# EAGLE board IO4-Turtle_array (EAGLE 7.7.0)
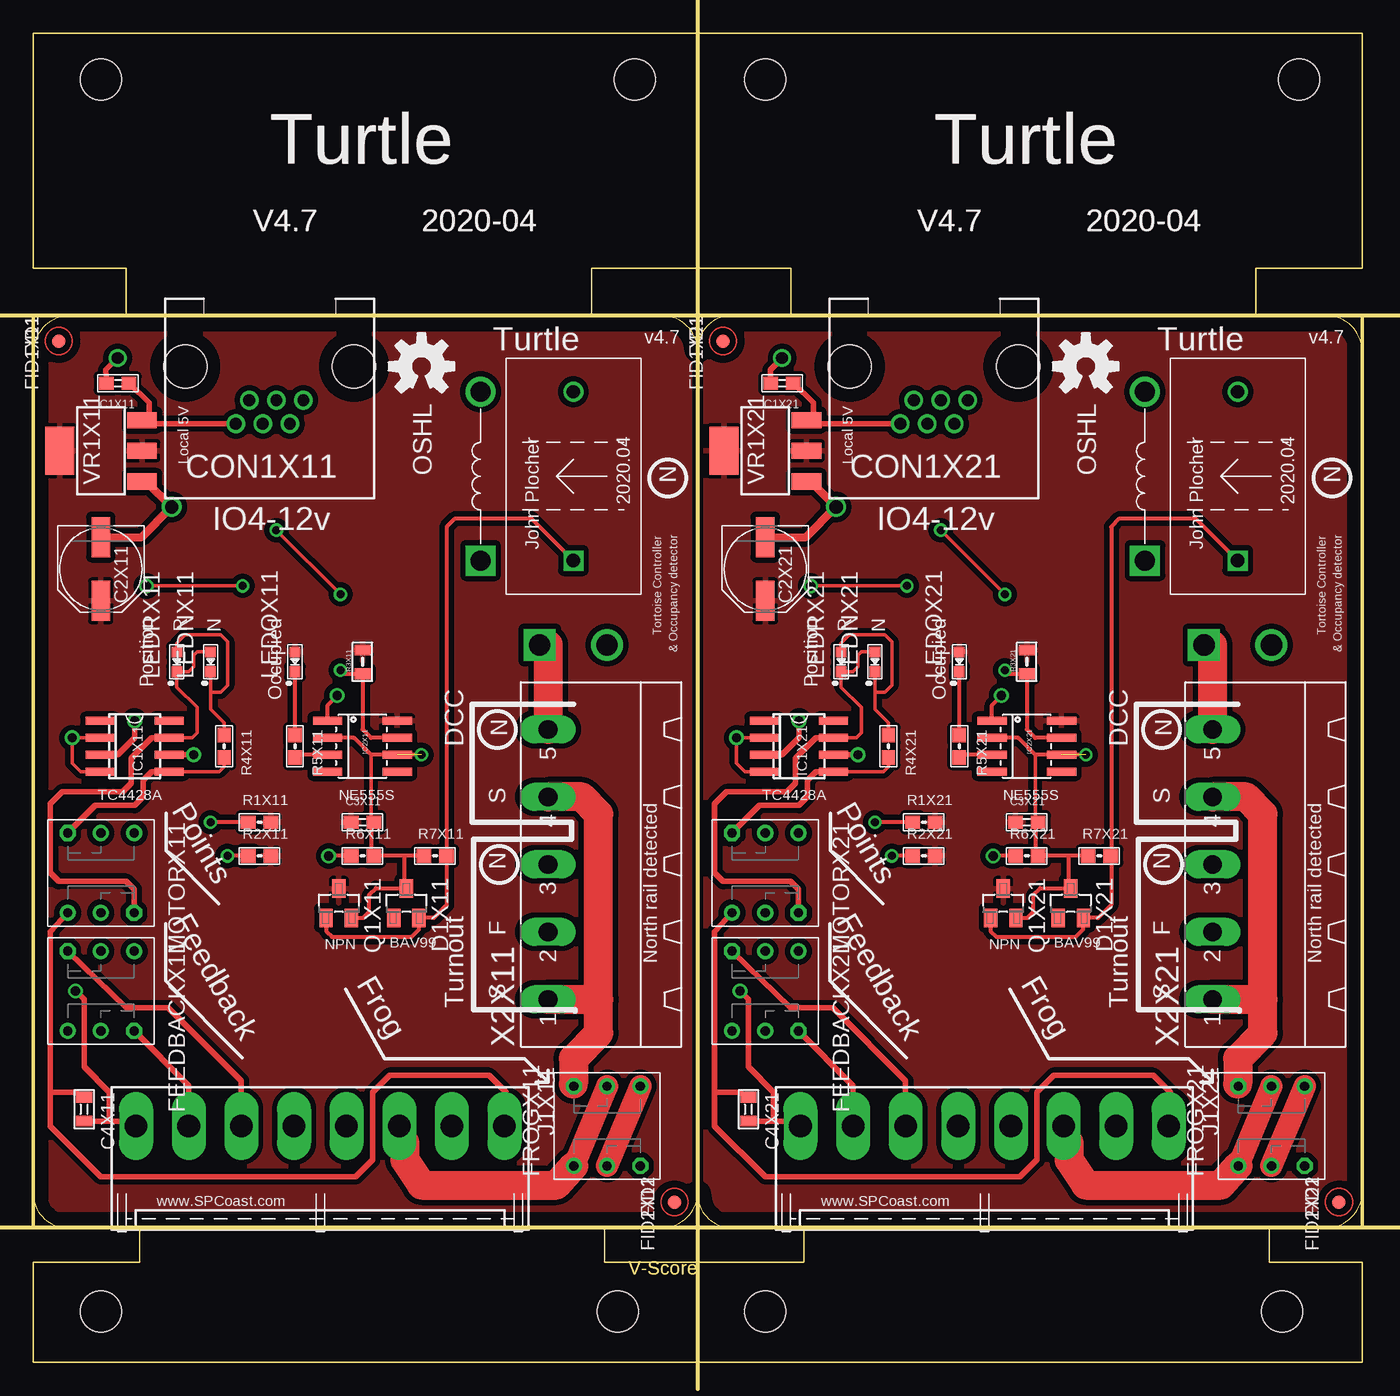
[diagram p0: board, top side]
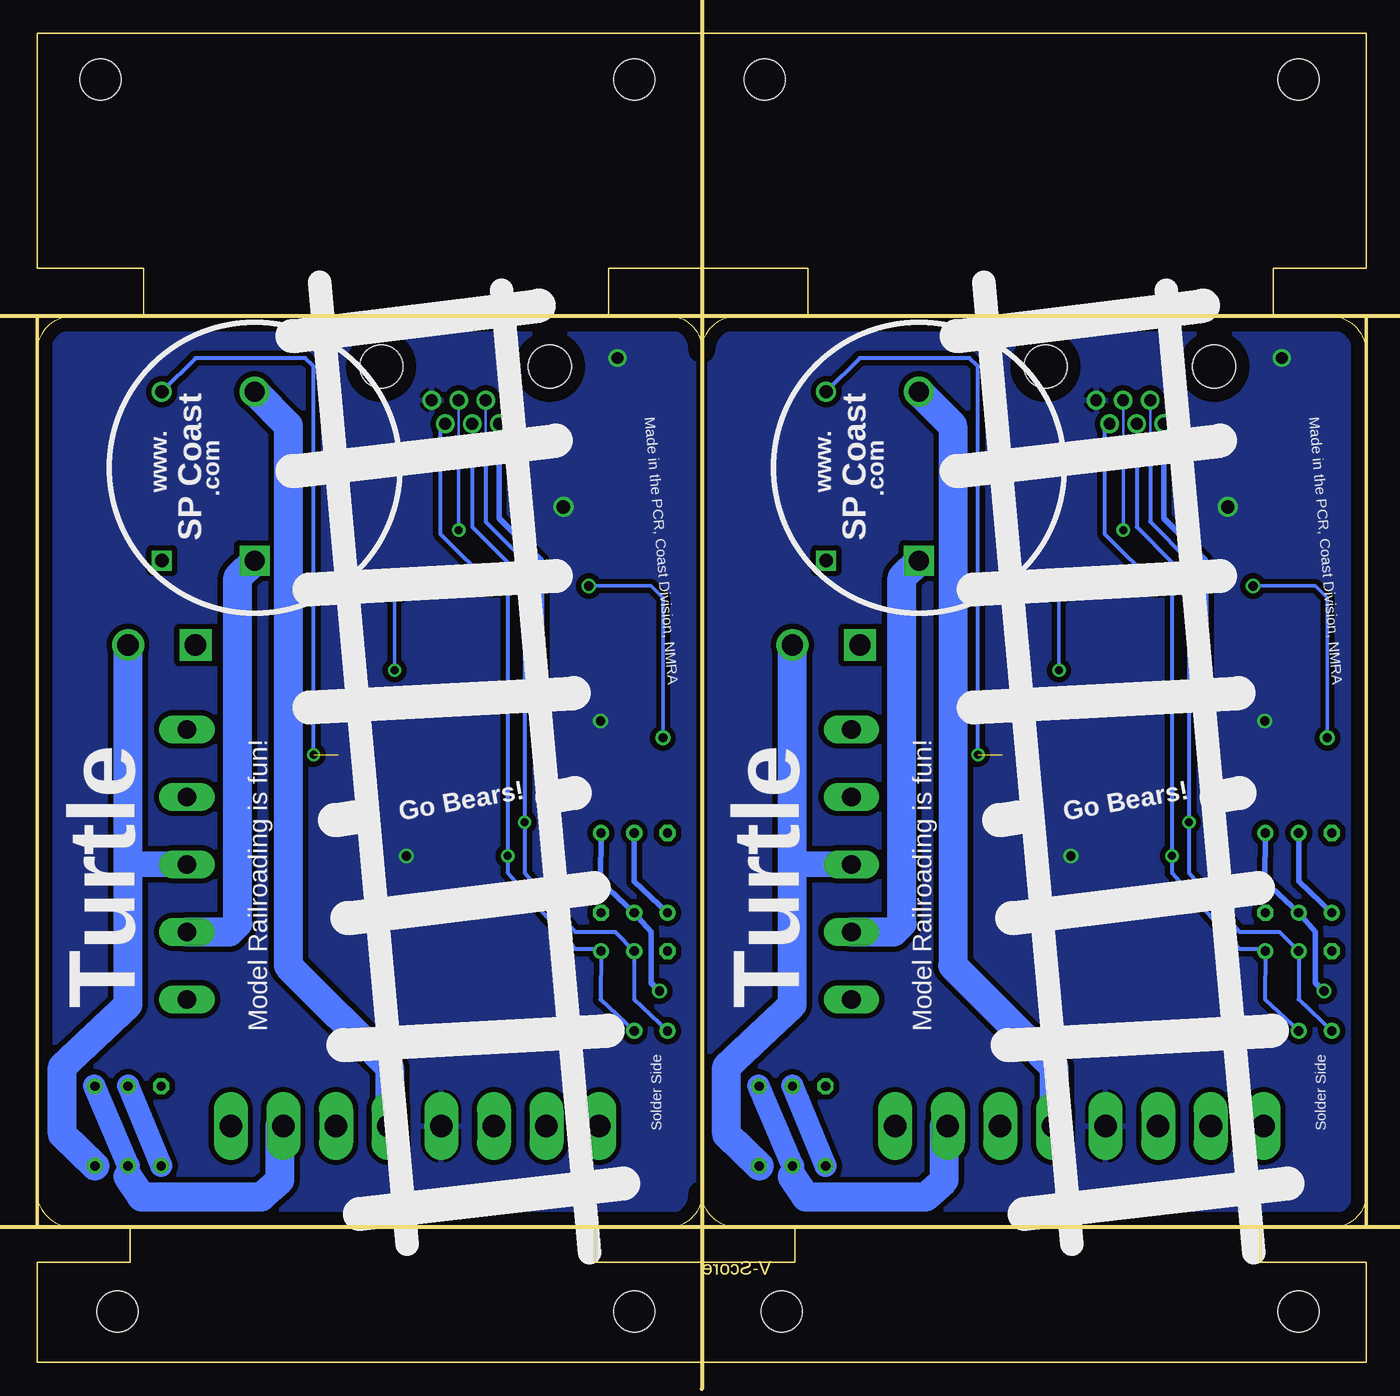
[diagram p1: board, bottom side, seen from below]

Size 100 x 68.58 mm. Coordinates in mm from the lower left corner, seen from the top.
Outline: 0,0 100,0 100,68.58 0,68.58 0,0
Copper layers (1*16): Top 0.035mm / dielectric 1.5mm / Bottom 0.035mm
Design rules "default": minimum track width 10mil, minimum drill 0.6mm, track to track 8mil, track to pad 8mil, pad to pad 8mil, via to via 8mil, smd to smd 8mil, copper to edge 40mil, drill to drill 8mil, minimum pad ring 10mil, minimum via ring 8mil, stop-mask expansion 4mil, vias tented up to drill 0mil, thermal gap 10mil
Milling: 1 lines

## Footprints (pad centres in the part's own frame; a part is rotated, then mirrored left to right if it is on the bottom)
0603-CAP = smd 1.1 x 1: 1 -0.85,0; 2 0.85,0
PANASONIC_D = smd 3 x 1.4: + 2.4,0; - -2.4,0
0805-CAP = smd 0.8 x 1.2: 1 -0.9,0; 2 0.9,0
RJ25-INVERTED = drill 0.9 pad 1.4: 1 2.54,4.318; 2 1.524,2.54; 3 0.508,4.318; 4 -0.508,2.54; 5 -1.524,4.318; 6 -2.54,2.54 | hole 3.251: -6.35,0; 6.35,0
SOT23 = smd 1.4 x 1: 1 1.1,-0.95; 2 1.1,0.95; 3 -1.1,0
8X8-SQ-PB = drill 0.7: 1A 3,-2.5; 1B 3,0; 2A -3,2.5; 2B -3,0 | drill 0.7 octagon: 1C 3,2.5; 2C -3,-2.5
FIDUCIAL_1MM = smd 1 x 1: 1 0,0
SO-08 = smd 0.6 x 2.2: 1 -1.905,-2.6; 2 -0.635,-2.6; 3 0.635,-2.6; 4 1.905,-2.6; 5 1.905,2.6; 6 0.635,2.6; 7 -0.635,2.6; 8 -1.905,2.6
SO08 = smd 0.61 x 2.21: 1 -1.905,-2.616; 2 -0.635,-2.616; 3 0.635,-2.616; 4 1.905,-2.616; 5 1.905,2.616; 6 0.635,2.616; 7 -0.635,2.616; 8 -1.905,2.616
KK-156-8-F = drill 1.7 pad 2.184 long: 1 -13.86,0; 2 -9.9,0; 3 -5.94,0; 4 -1.98,0; 5 1.98,0; 6 5.94,0; 7 9.9,0; 8 13.86,0
0603-LED = smd 0.8 x 0.8: A 0.75,0; C -0.75,0
BULB-3156 = drill 1.5 square: P$1 -6.35,0 | drill 1.5: P$2 6.35,0
0603-RES = smd 1.1 x 1: 1 -0.85,0; 2 0.85,0
0805-RES = smd 0.8 x 1.2: 1 -0.9,0; 2 0.9,0
TH-T4 = drill 1.6 square: P1 -12.7,2.54 | drill 1.6: P2 -12.7,-2.54 | drill 1 square: S1 -6.35,0 | drill 1: S2 6.35,0
SOT223 = smd 1.219 x 2.235: 1 -2.311,-3.099; 2 0,-3.099; 3 2.311,-3.099 | smd 3.6 x 2.2: 4 0,3.099
BOARD-DINRAIL-2.7IN-5CM-DUAL = hole 3.1: 5.08,96.52; 45.25,96.52; 5.08,3.81; 43.98,3.81; 55.08,96.52; 95.25,96.52; 55.08,3.81; 93.98,3.81
MSTBA5 = drill 1.397 long: 1 -10.16,5.08; 2 -5.08,5.08; 3 0,5.08; 4 5.08,5.08; 5 10.16,5.08

## Placement (x,y rotation side)
C1X11  10uf  [0603-CAP]  6.35,63.5 180 top
C1X21  10uf  [0603-CAP]  56.35,63.5 180 top
C2X11  100uf  [PANASONIC_D]  5.08,49.53 270 top
C2X21  100uf  [PANASONIC_D]  55.08,49.53 270 top
C3X11  2.2uf  [0603-CAP]  24.77,30.48 0 top
C3X21  2.2uf  [0603-CAP]  74.77,30.48 0 top
C4X11  0.1uf  [0805-CAP]  3.81,8.89 270 top
C4X21  0.1uf  [0805-CAP]  53.81,8.89 270 top
CON1X11  RJ12/6  [RJ25-INVERTED]  17.78,64.77 180 top
CON1X21  RJ12/6  [RJ25-INVERTED]  67.78,64.77 180 top
D1X11  BAV99  [SOT23]  28.07,24.38 270 top
D1X21  BAV99  [SOT23]  78.07,24.38 270 top
FEEDBACKX11  DPDT  [8X8-SQ-PB]  5.08,17.78 270 top
FEEDBACKX21  DPDT  [8X8-SQ-PB]  55.08,17.78 270 top
FID1X11  FIDUCIAL  [FIDUCIAL_1MM]  1.91,66.67 270 top
FID1X21  FIDUCIAL  [FIDUCIAL_1MM]  51.91,66.67 270 top
FID2X11  FIDUCIAL  [FIDUCIAL_1MM]  48.26,1.9 270 top
FID2X21  FIDUCIAL  [FIDUCIAL_1MM]  98.26,1.9 270 top
FROGX11  DPDT  [8X8-SQ-PB]  43.18,7.62 90 top
FROGX21  DPDT  [8X8-SQ-PB]  93.18,7.62 90 top
IC1X11  TC4428A  [SO-08]  7.62,36.19 270 top
IC1X21  TC4428A  [SO-08]  57.62,36.19 270 top
IC2X11  NE555S  [SO08]  24.77,36.19 270 top
IC2X21  NE555S  [SO08]  74.77,36.19 270 top
J1X11  0.156  [KK-156-8-F]  21.59,7.62 180 top
J1X21  0.156  [KK-156-8-F]  71.59,7.62 180 top
LEDNX11  G  [0603-LED]  13.34,42.55 90 top
LEDNX21  G  [0603-LED]  63.34,42.55 90 top
LEDOX11  Y  [0603-LED]  19.68,42.55 90 top
LEDOX21  Y  [0603-LED]  69.69,42.55 90 top
LEDRX11  R  [0603-LED]  10.79,42.55 90 top
LEDRX21  R  [0603-LED]  60.8,42.55 90 top
LMP1X11  12v  [BULB-3156]  33.66,56.52 90 top
LMP1X21  12v  [BULB-3156]  83.66,56.52 90 top
MOTORX11  DPDT  [8X8-SQ-PB]  5.08,26.67 270 top
MOTORX21  DPDT  [8X8-SQ-PB]  55.08,26.67 270 top
OSHW1X11  OSHW  [OSHW-LOGO-M]  29.21,64.77 0 top
OSHW1X21  OSHW  [OSHW-LOGO-M]  79.21,64.77 0 top
Q1X11  NPN  [SOT23]  22.99,24.38 270 top
Q1X21  NPN  [SOT23]  72.99,24.38 270 top
R1X11  10k  [0603-RES]  17.02,30.48 0 top
R1X21  10k  [0603-RES]  67.02,30.48 0 top
R2X11  10k  [0603-RES]  17.02,27.94 0 top
R2X21  10k  [0603-RES]  67.02,27.94 0 top
R3X11  10k  [0805-RES]  24.77,42.55 90 top
R3X21  10k  [0805-RES]  74.77,42.55 90 top
R4X11  2K0  [0603-RES]  14.35,36.19 270 top
R4X21  2K0  [0603-RES]  64.35,36.19 270 top
R5X11  1K0  [0603-RES]  19.68,36.19 270 top
R5X21  1K0  [0603-RES]  69.69,36.19 270 top
R6X11  1M0  [0603-RES]  24.77,27.94 0 top
R6X21  1M0  [0603-RES]  74.77,27.94 0 top
R7X11  10K  [0603-RES]  30.23,27.94 0 top
R7X21  10K  [0603-RES]  80.23,27.94 0 top
TR1X11  CoilCraft  [TH-T4]  40.64,56.52 90 top
TR1X21  CoilCraft  [TH-T4]  90.64,56.52 90 top
VR1X11  LM1117-5  [SOT223]  5.08,58.42 90 top
VR1X21  LM1117-5  [SOT223]  55.08,58.42 90 top
X2X1  10x10  [BOARD-DINRAIL-2.7IN-5CM-DUAL]  0,-10.16 0 top
X2X11  0.200  [MSTBA5]  43.81,27.31 90 top
X2X21  0.200  [MSTBA5]  93.81,27.31 90 top

## Library data of the parts
C1X11 C1X21 C2X11 C2X21 C3X11 C3X21 C4X11 C4X21 CON1X11 CON1X21 D1X11 D1X21 FEEDBACKX11 FEEDBACKX21 FID1X11 FID1X21 FID2X11 FID2X21 FROGX11 FROGX21 IC1X11 IC1X21 IC2X11 IC2X21 J1X11 J1X21 LEDNX11 LEDNX21 LEDOX11 LEDOX21 LEDRX11 LEDRX21 LMP1X11 LMP1X21 MOTORX11 MOTORX21 OSHW1X11 OSHW1X21 Q1X11 Q1X21 R1X11 R1X21 R2X11 R2X21 R3X11 R3X21 R4X11 R4X21 R5X11 R5X21 R6X11 R6X21 R7X11 R7X21 TR1X11 TR1X21 VR1X11 VR1X21 X2X1 X2X11 X2X21 = SPCoast

## Nets
!INORMALX11: CON1X11.3 FEEDBACKX11.1B FEEDBACKX11.2A R2X11.1
!INORMALX21: CON1X21.3 FEEDBACKX21.1B FEEDBACKX21.2A R2X21.1
!IOCCUPIEDX11: CON1X11.4 IC2X11.7 R3X11.1
!IOCCUPIEDX21: CON1X21.4 IC2X21.7 R3X21.1
!IREVERSEX11: CON1X11.2 FEEDBACKX11.1A FEEDBACKX11.2B R1X11.1
!IREVERSEX21: CON1X21.2 FEEDBACKX21.1A FEEDBACKX21.2B R1X21.1
!KNORMALX11: CON1X11.5 IC1X11.2 IC1X11.4
!KNORMALX21: CON1X21.5 IC1X21.2 IC1X21.4
+12VX11: C1X11.1 CON1X11.1 IC1X11.6 VR1X11.3
+12VX21: C1X21.1 CON1X21.1 IC1X21.6 VR1X21.3
DCC-N-INX11: TR1X11.P1 X2X11.5
DCC-N-INX21: TR1X21.P1 X2X21.5
DCC-N-OUTX11: FROGX11.2C TR1X11.P2 X2X11.3
DCC-N-OUTX21: FROGX21.2C TR1X21.P2 X2X21.3
DCC-SX11: FROGX11.1C X2X11.1 X2X11.4
DCC-SX21: FROGX21.1C X2X21.1 X2X21.4
FROGX11: LMP1X11.P$1 X2X11.2
FROGX21: LMP1X21.P$1 X2X21.2
GNDX11: C1X11.2 C2X11.- CON1X11.6 IC1X11.3 IC2X11.1 J1X11.5 R6X11.1 VR1X11.1
GNDX21: C1X21.2 C2X21.- CON1X21.6 IC1X21.3 IC2X21.1 J1X21.5 R6X21.1 VR1X21.1
M+X11: C4X11.1 J1X11.1 MOTORX11.1A MOTORX11.2B
M+X21: C4X21.1 J1X21.1 MOTORX21.1A MOTORX21.2B
M-X11: C4X11.2 J1X11.8 MOTORX11.1B MOTORX11.2A
M-X21: C4X21.2 J1X21.8 MOTORX21.1B MOTORX21.2A
N$1X11: IC1X11.7 LEDNX11.A LEDRX11.C MOTORX11.1C
N$1X21: IC1X21.7 LEDNX21.A LEDRX21.C MOTORX21.1C
N$2X11: D1X11.2 Q1X11.1 R7X11.2 TR1X11.S1
N$2X21: D1X21.2 Q1X21.1 R7X21.2 TR1X21.S1
N$3X11: LEDNX11.C LEDRX11.A R4X11.1
N$3X21: LEDNX21.C LEDRX21.A R4X21.1
N$8X11: LEDOX11.C R5X11.1
N$8X21: LEDOX21.C R5X21.1
N$9X11: IC2X11.3 R5X11.2
N$9X21: IC2X21.3 R5X21.2
N$16X11: FEEDBACKX11.2C J1X11.6
N$16X21: FEEDBACKX21.2C J1X21.6
N$17X11: FEEDBACKX11.1C J1X11.7
N$17X21: FEEDBACKX21.1C J1X21.7
N$19X11: IC1X11.5 MOTORX11.2C R4X11.2
N$19X21: IC1X21.5 MOTORX21.2C R4X21.2
NX11: FROGX11.1A FROGX11.2B J1X11.2
NX21: FROGX21.1A FROGX21.2B J1X21.2
PROTECTED_FROGX11: J1X11.4 LMP1X11.P$2
PROTECTED_FROGX21: J1X21.4 LMP1X21.P$2
SX11: FROGX11.1B FROGX11.2A J1X11.3
SX21: FROGX21.1B FROGX21.2A J1X21.3
TRIGGERX11: C3X11.2 D1X11.3 IC2X11.2 IC2X11.6 Q1X11.2 R6X11.2 R7X11.1 TR1X11.S2
TRIGGERX21: C3X21.2 D1X21.3 IC2X21.2 IC2X21.6 Q1X21.2 R6X21.2 R7X21.1 TR1X21.S2
V+X11: C2X11.+ C3X11.1 IC2X11.8 LEDOX11.A Q1X11.3 R1X11.2 R2X11.2 R3X11.2 VR1X11.2 VR1X11.4
V+X21: C2X21.+ C3X21.1 IC2X21.8 LEDOX21.A Q1X21.3 R1X21.2 R2X21.2 R3X21.2 VR1X21.2 VR1X21.4

## Tracks (layer width: path | path; a pad name or v marks a point on that pad's centre or on a via)
!INORMALX11  (via drill 0.6 pad 0.9)
  Top 0.305: R2X11.1 v14.61,27.94
  Bottom 0.305: FEEDBACKX11.1B 7.62,17.14 FEEDBACKX11.2A 7.75,20.95 9.53,20.95 14.61,26.67 v14.61,27.94 14.61,50.04 17.27,52.7 CON1X11.3
!INORMALX21  (via drill 0.6 pad 0.9)
  Top 0.305: R2X21.1 v64.61,27.94
  Bottom 0.305: FEEDBACKX21.1B 57.62,17.14 FEEDBACKX21.2A 57.76,20.95 59.52,20.95 64.61,26.67 v64.61,27.94 64.61,50.04 67.27,52.7 CON1X21.3
!IOCCUPIEDX11  (via drill 0.6 pad 0.9)
  Top 0.254: v18.29,52.45 v23.11,47.62
  Top 0.305: IC2X11.7 25.4,36.83 24.77,37.47 R3X11.1 23.38,41.64 v23.11,41.91
  Bottom 0.203: CON1X11.4 18.29,59.44
  Bottom 0.254: 18.29,59.44 v18.29,52.45 | v23.11,41.91 v23.11,47.62
!IOCCUPIEDX21  (via drill 0.6 pad 0.9)
  Top 0.254: v68.29,52.45 v73.11,47.62
  Top 0.305: IC2X21.7 75.4,36.83 74.77,37.47 R3X21.1 73.38,41.64 v73.11,41.91
  Bottom 0.203: CON1X21.4 68.29,59.44
  Bottom 0.254: 68.29,59.44 v68.29,52.45 | v73.11,41.91 v73.11,47.62
!IREVERSEX11  (via drill 0.6 pad 0.9)
  Top 0.305: R1X11.1 v13.34,30.48
  Bottom 0.203: 16.26,59.44 CON1X11.2
  Bottom 0.305: FEEDBACKX11.1A 5.08,17.14 FEEDBACKX11.2B 6.53,22.22 9.53,22.22 13.34,26.67 v13.34,30.48 13.34,50.17 16.26,53.09 16.26,59.44
!IREVERSEX21  (via drill 0.6 pad 0.9)
  Top 0.305: R1X21.1 v63.34,30.48
  Bottom 0.203: 66.26,59.44 CON1X21.2
  Bottom 0.305: FEEDBACKX21.1A 55.08,17.14 FEEDBACKX21.2B 56.52,22.22 59.52,22.22 63.34,26.67 v63.34,30.48 63.34,50.17 66.26,53.09 66.26,59.44
!KNORMALX11  (via drill 0.6 pad 0.9, 0.7 pad 1.05)
  Top 0.254: v15.75,48.26 v8.51,48.26 | IC1X11.4 3.56,34.29 2.92,34.92 v2.92,36.83 IC1X11.2
  Bottom 0.254: v8.51,48.26 3.81,48.26 2.92,47.37 v2.92,36.83
  Bottom 0.305: CON1X11.5 19.68,60.07 19.68,52.2 v15.75,48.26
!KNORMALX21  (via drill 0.6 pad 0.9, 0.7 pad 1.05)
  Top 0.254: v65.75,48.26 v58.51,48.26 | IC1X21.4 53.56,34.29 52.92,34.92 v52.92,36.83 IC1X21.2
  Bottom 0.254: v58.51,48.26 53.81,48.26 52.92,47.37 v52.92,36.83
  Bottom 0.305: CON1X21.5 69.69,60.07 69.69,52.2 v65.75,48.26
+12VX11  (via drill 0.7 pad 1.05)
  Top 0.406: 8.72,60.96 VR1X11.3 | CON1X11.1 8.85,60.45 8.72,60.96 | 8.72,60.96 8.72,62.03 C1X11.1 | IC1X11.6 v12.06,35.56
  Bottom 0.406: v12.06,35.56 12.06,50.17 15.24,53.34 CON1X11.1
+12VX21  (via drill 0.7 pad 1.05)
  Top 0.406: 58.72,60.96 VR1X21.3 | CON1X21.1 58.85,60.45 58.72,60.96 | 58.72,60.96 58.72,62.03 C1X21.1 | IC1X21.6 v62.06,35.56
  Bottom 0.406: v62.06,35.56 62.06,50.17 65.24,53.34 CON1X21.1
DCC-N-INX11
  Top 2.184: TR1X11.P1 38.73,43.81 X2X11.5
DCC-N-INX21
  Top 2.184: TR1X21.P1 88.73,43.81 X2X21.5
DCC-N-OUTX11
  Bottom 1.778: 42.55,27.31 43.18,27.94
  Bottom 1.93: X2X11.3 42.55,27.31
  Bottom 2.184: FROGX11.2C 48.13,6.98 48.13,12.07 43.18,16.76 43.18,27.94 TR1X11.P2
DCC-N-OUTX21
  Bottom 1.778: 92.55,27.31 93.18,27.94
  Bottom 1.93: X2X21.3 92.55,27.31
  Bottom 2.184: FROGX21.2C 98.13,6.98 98.13,12.07 93.18,16.76 93.18,27.94 TR1X21.P2
DCC-SX11
  Top 1.778: 40.64,10.79 FROGX11.1C
  Top 2.184: 42.55,17.14 42.55,14.61 40.64,12.7 40.64,10.79 | 42.55,17.14 42.55,31.11 41.27,32.39 X2X11.4 | X2X11.1 42.55,17.14
DCC-SX21
  Top 1.778: 90.64,10.79 FROGX21.1C
  Top 2.184: 92.55,17.14 92.55,14.61 90.64,12.7 90.64,10.79 | 92.55,17.14 92.55,31.11 91.28,32.39 X2X21.4 | X2X21.1 92.55,17.14
FROGX11
  Bottom 2.184: X2X11.2 35.56,22.22 34.92,22.86 34.92,48.89 LMP1X11.P$1
FROGX21
  Bottom 2.184: X2X21.2 85.56,22.22 84.92,22.86 84.92,48.89 LMP1X21.P$1
GNDX11  (via drill 0.7 pad 1.05, 0.9 pad 1.35, 1 pad 1.5)
  Top 0.254: 6.35,35.56 IC1X11.3
  Top 0.305: R6X11.1 v22.23,27.94 | IC2X11.1 22.15,39.29 v22.86,40
  Top 0.406: 6.35,35.56 7.62,36.83 v7.62,38.1 | v6.35,65.41 5.46,64.52 C1X11.2
  Top 0.61: VR1X11.1 8.51,56.11 v10.41,54.2 8.14,51.93 C2X11.-
  pour Bottom (isolate 0.406): 49.37,67.69 49.37,0.63 0.64,0.63 0.64,67.69
GNDX21  (via drill 0.7 pad 1.05, 0.9 pad 1.35, 1 pad 1.5)
  Top 0.254: 56.35,35.56 IC1X21.3
  Top 0.305: R6X21.1 v72.22,27.94 | IC2X21.1 72.15,39.29 v72.86,40
  Top 0.406: 56.35,35.56 57.62,36.83 v57.62,38.1 | v56.35,65.41 55.46,64.52 C1X21.2
  Top 0.61: VR1X21.1 58.51,56.11 v60.41,54.2 58.14,51.93 C2X21.-
  pour Bottom (isolate 0.406): 99.36,67.69 99.36,0.63 50.63,0.63 50.63,67.69
M+X11
  Top 0.406: MOTORX11.1A 1.27,22.22 1.27,10.16 | 1.27,10.16 1.27,7.62 5.08,3.81 24.26,3.81 25.53,5.08 25.53,10.16 26.8,11.43 34.29,11.43 35.56,10.16 35.45,10.05 J1X11.1 | C4X11.1 3.17,10.16 1.27,10.16
  Bottom 0.406: MOTORX11.2B 5.08,26.04 MOTORX11.1A
M+X21
  Top 0.406: MOTORX21.1A 51.27,22.22 51.27,10.16 | 51.27,10.16 51.27,7.62 55.08,3.81 74.26,3.81 75.53,5.08 75.53,10.16 76.8,11.43 84.29,11.43 85.56,10.16 85.45,10.05 J1X21.1 | C4X21.1 53.17,10.16 51.27,10.16
  Bottom 0.406: MOTORX21.2B 55.08,26.04 MOTORX21.1A
M-X11  (via drill 0.7 pad 1.05)
  Top 0.406: v3.17,17.78 3.81,17.14 3.81,12.07 5.71,10.16 5.71,8.25 5.67,7.99 | C4X11.2 5.67,7.99 | 5.67,7.99 7.36,7.99 J1X11.8
  Bottom 0.406: MOTORX11.2A 7.62,26.04 MOTORX11.1B 3.81,22.22 3.81,18.41 v3.17,17.78
M-X21  (via drill 0.7 pad 1.05)
  Top 0.406: v53.17,17.78 53.81,17.14 53.81,12.07 55.72,10.16 55.72,8.25 55.67,7.99 | C4X21.2 55.67,7.99 | 55.67,7.99 57.36,7.99 J1X21.8
  Bottom 0.406: MOTORX21.2A 57.62,26.04 MOTORX21.1B 53.81,22.22 53.81,18.41 v53.17,17.78
N$1X11
  Top 0.254: IC1X11.7 11.94,36.83 12.32,37.21 12.32,39.12 10.79,40.64 LEDRX11.C 11.67,41.8 11.68,41.78 12.06,42.16 12.06,43.05 12.32,43.31 13.32,43.31 LEDNX11.A
  Top 0.406: MOTORX11.1C 7.58,25.44 6.99,26.04 1.91,26.04 1.27,26.67 1.27,31.88 2.16,32.77 6.73,32.77 7.37,33.4 7.37,35.31 8.89,36.83 IC1X11.7
N$1X21
  Top 0.254: IC1X21.7 61.94,36.83 62.32,37.21 62.32,39.12 60.8,40.64 LEDRX21.C 61.67,41.8 61.68,41.78 62.06,42.16 62.06,43.05 62.32,43.31 63.32,43.31 LEDNX21.A
  Top 0.406: MOTORX21.1C 57.58,25.44 56.98,26.04 51.91,26.04 51.27,26.67 51.27,31.88 52.16,32.77 56.73,32.77 57.37,33.4 57.37,35.31 58.89,36.83 IC1X21.7
N$2X11
  Top 0.305: TR1X11.S1 37.47,53.34 31.75,53.34 31.11,52.7 31.11,27.94 | 31.11,27.94 R7X11.2 | 31.11,27.94 31.11,24.26 30.14,23.28 D1X11.2 29.02,22.41 28.45,21.84 22.48,21.84 22.04,22.29 Q1X11.1
N$2X21
  Top 0.305: TR1X21.S1 87.47,53.34 81.75,53.34 81.11,52.7 81.11,27.94 | 81.11,27.94 R7X21.2 | 81.11,27.94 81.11,24.26 80.14,23.28 D1X21.2 79.02,22.41 78.45,21.84 72.48,21.84 72.04,22.29 Q1X21.1
N$3X11
  Top 0.254: LEDNX11.C 13.34,40.26 | 13.34,40.26 13.34,38.99 14.35,37.97 R4X11.1 | LEDRX11.A 10.79,43.94 11.43,44.58 14.1,44.58 14.61,44.07 14.61,40.77 14.1,40.26 13.34,40.26
N$3X21
  Top 0.254: LEDNX21.C 63.34,40.26 | 63.34,40.26 63.34,38.99 64.35,37.97 R4X21.1 | LEDRX21.A 60.8,43.94 61.43,44.58 64.1,44.58 64.61,44.07 64.61,40.77 64.1,40.26 63.34,40.26
N$8X11
  Top 0.305: R5X11.1 LEDOX11.C
N$8X21
  Top 0.305: R5X21.1 LEDOX21.C
N$9X11
  Top 0.305: IC2X11.3 20.05,35.56 R5X11.2
N$9X21
  Top 0.305: IC2X21.3 70.06,35.56 R5X21.2
N$16X11
  Top 0.406: FEEDBACKX11.2C 6.99,16.51 10.16,16.51 15.65,11.02 J1X11.6
N$16X21
  Top 0.406: FEEDBACKX21.2C 56.98,16.51 60.16,16.51 65.65,11.02 J1X21.6
N$17X11
  Top 0.406: FEEDBACKX11.1C 11.69,10.67 J1X11.7
N$17X21
  Top 0.406: FEEDBACKX21.1C 61.69,10.67 J1X21.7
N$19X11
  Top 0.254: R4X11.2 14.35,34.67 13.97,34.29 IC1X11.5
  Top 0.406: MOTORX11.2C 4.66,31.75 7.62,31.75 8.26,32.39 8.26,33.66 8.89,34.29 IC1X11.5
N$19X21
  Top 0.254: R4X21.2 64.35,34.67 63.97,34.29 IC1X21.5
  Top 0.406: MOTORX21.2C 54.66,31.75 57.62,31.75 58.26,32.39 58.26,33.66 58.89,34.29 IC1X21.5
NX11
  Top 1.676: FROGX11.2B FROGX11.1A
  Bottom 1.676: FROGX11.2B 45.72,10.67
  Bottom 1.778: 43.18,3.81 FROGX11.2B | J1X11.2 31.75,7.62
  Bottom 2.184: 31.75,7.62 31.75,3.56 33.15,2.29 42.16,2.29 43.18,3.81
NX21
  Top 1.676: FROGX21.2B FROGX21.1A
  Bottom 1.676: FROGX21.2B 95.72,10.67
  Bottom 1.778: 93.18,3.81 FROGX21.2B | J1X21.2 81.75,7.62
  Bottom 2.184: 81.75,7.62 81.75,3.56 83.15,2.29 92.16,2.29 93.18,3.81
PROTECTED_FROGX11
  Bottom 1.778: J1X11.4 23.5,7.7
  Bottom 2.184: LMP1X11.P$2 31.11,60.33 31.11,19.68 23.5,12.07 23.5,7.7
PROTECTED_FROGX21
  Bottom 1.778: J1X21.4 73.5,7.7
  Bottom 2.184: LMP1X21.P$2 81.11,60.33 81.11,19.68 73.5,12.07 73.5,7.7
SX11
  Top 1.676: FROGX11.2A FROGX11.1B
  Top 1.93: 27.53,6.76 27.94,6.35
  Top 2.184: 27.94,6.35 27.94,5.08 29.21,3.18 39.37,3.18 FROGX11.2A | J1X11.3 27.53,6.76
  Bottom 1.676: FROGX11.2A 43.18,10.67
SX21
  Top 1.676: FROGX21.2A FROGX21.1B
  Top 1.93: 77.53,6.76 77.94,6.35
  Top 2.184: 77.94,6.35 77.94,5.08 79.21,3.18 89.37,3.18 FROGX21.2A | J1X21.3 77.53,6.76
  Bottom 1.676: FROGX21.2A 93.18,10.67
TRIGGERX11  (via drill 0.6 pad 0.9)  (1 unrouted)
  Top 0.254: 25.4,35.56 25.4,30.48 25.66,30.75 C3X11.2 | 25.4,28.21 R6X11.2
  Top 0.305: v29.21,35.56 25.4,35.56 24.13,36.83 IC2X11.2 | 25.4,30.48 25.4,28.21 | R7X11.1 27.94,27.94 | 27.94,27.94 R6X11.2 25.4,27.68 | Q1X11.2 24.81,23.28 25.27,23.75 25.27,25.02 25.78,25.53 28.02,25.53 D1X11.3 27.94,25.61 27.94,27.94
  Bottom 0.305: v29.21,35.56 29.21,64.77 29.84,65.41 38.1,65.41 TR1X11.S2
TRIGGERX21  (via drill 0.6 pad 0.9)  (1 unrouted)
  Top 0.254: 75.4,35.56 75.4,30.48 75.67,30.75 C3X21.2 | 75.4,28.21 R6X21.2
  Top 0.305: v79.21,35.56 75.4,35.56 74.13,36.83 IC2X21.2 | 75.4,30.48 75.4,28.21 | R7X21.1 77.94,27.94 | 77.94,27.94 R6X21.2 75.4,27.68 | Q1X21.2 74.81,23.28 75.27,23.75 75.27,25.02 75.78,25.53 78.02,25.53 D1X21.3 77.94,25.61 77.94,27.94
  Bottom 0.305: v79.21,35.56 79.21,64.77 79.84,65.41 88.1,65.41 TR1X21.S2
V+X11
  pour Top (isolate 0.406): 49.37,67.69 49.37,0.63 0.64,0.63 0.64,67.69
V+X21
  pour Top (isolate 0.406): 99.36,67.69 99.36,0.63 50.63,0.63 50.63,67.69

## Text on the board
tPlace: Turtle | Turtle | Turtle | Turtle | V4.7 | V4.7 | 2020-04 | 2020-04 | V4.7 | V4.7 | 2020-04 | 2020-04 | FID1 | FID1 | v4.7 | v4.7 | Turtle | Turtle | Local 5V | OSHL | Local 5V | OSHL | 2020.04 | 2020.04 | N | N | IO4-12v | IO4-12v | John Plocher | John Plocher | Position | R | N | Occupied | Position | R | N | Occupied | Tortoise Controller | Tortoise Controller | & Occupancy detector | & Occupancy detector | N | N | DCC | DCC | TC4428A | Points | NE555S | S | TC4428A | Points | NE555S | S | N | N | Feedback | Feedback | NPN | BAV99 | F | NPN | BAV99 | F | North rail detected | North rail detected | Frog | Frog | Turnout | S | Turnout | S | FID2 | FID2 | www.SPCoast.com | www.SPCoast.com
bPlace: .com | www. | .com | www. | SP Coast | SP Coast | Made in the PCR, Coast Division, NMRA | Made in the PCR, Coast Division, NMRA | Go Bears! | Go Bears! | Turtle | Turtle | Model Railroading is fun! | Model Railroading is fun! | Solder Side | Solder Side
Milling: V-Score | V-Score
_tNames: C1 | C1 | C1 | C1 | CON1 | CON1 | CON1 | CON1 | VR1 | VR1 | VR1 | VR1 | C2 | C2 | C2 | C2 | LEDR | LEDR | LEDN | LEDN | LEDO | LEDO | LEDR | LEDR | LEDN | LEDN | LEDO | LEDO | R3 | R3 | R3 | R3 | IC1 | IC1 | IC2 | IC2 | IC1 | IC1 | IC2 | IC2 | R4 | R4 | R5 | R5 | R4 | R4 | R5 | R5 | MOTOR | MOTOR | MOTOR | MOTOR | R1 | R1 | C3 | C3 | R1 | R1 | C3 | C3 | R7 | R7 | R7 | R7 | R2 | R2 | R2 | R2 | R6 | R6 | R6 | R6 | Q1 | Q1 | D1 | D1 | Q1 | Q1 | D1 | D1 | X2 | X2 | X2 | X2 | FEEDBACK | FEEDBACK | FEEDBACK | FEEDBACK | C4 | C4 | C4 | C4 | FROG | FROG | FROG | FROG | J1 | J1 | J1 | J1